# Altium PCB MicrophoneArray.Sensors.Electronics.PcbDoc
Units mm, origin at the board's own origin, x right, y up, seen from the top; angles counter-clockwise.
Board outline 53.34 x 53.34 mm, 2 copper layers (Top Layer, Bottom Layer), stack 1.036 mm thick; 20 components, 13 nets, 164 pads, 49 vias.
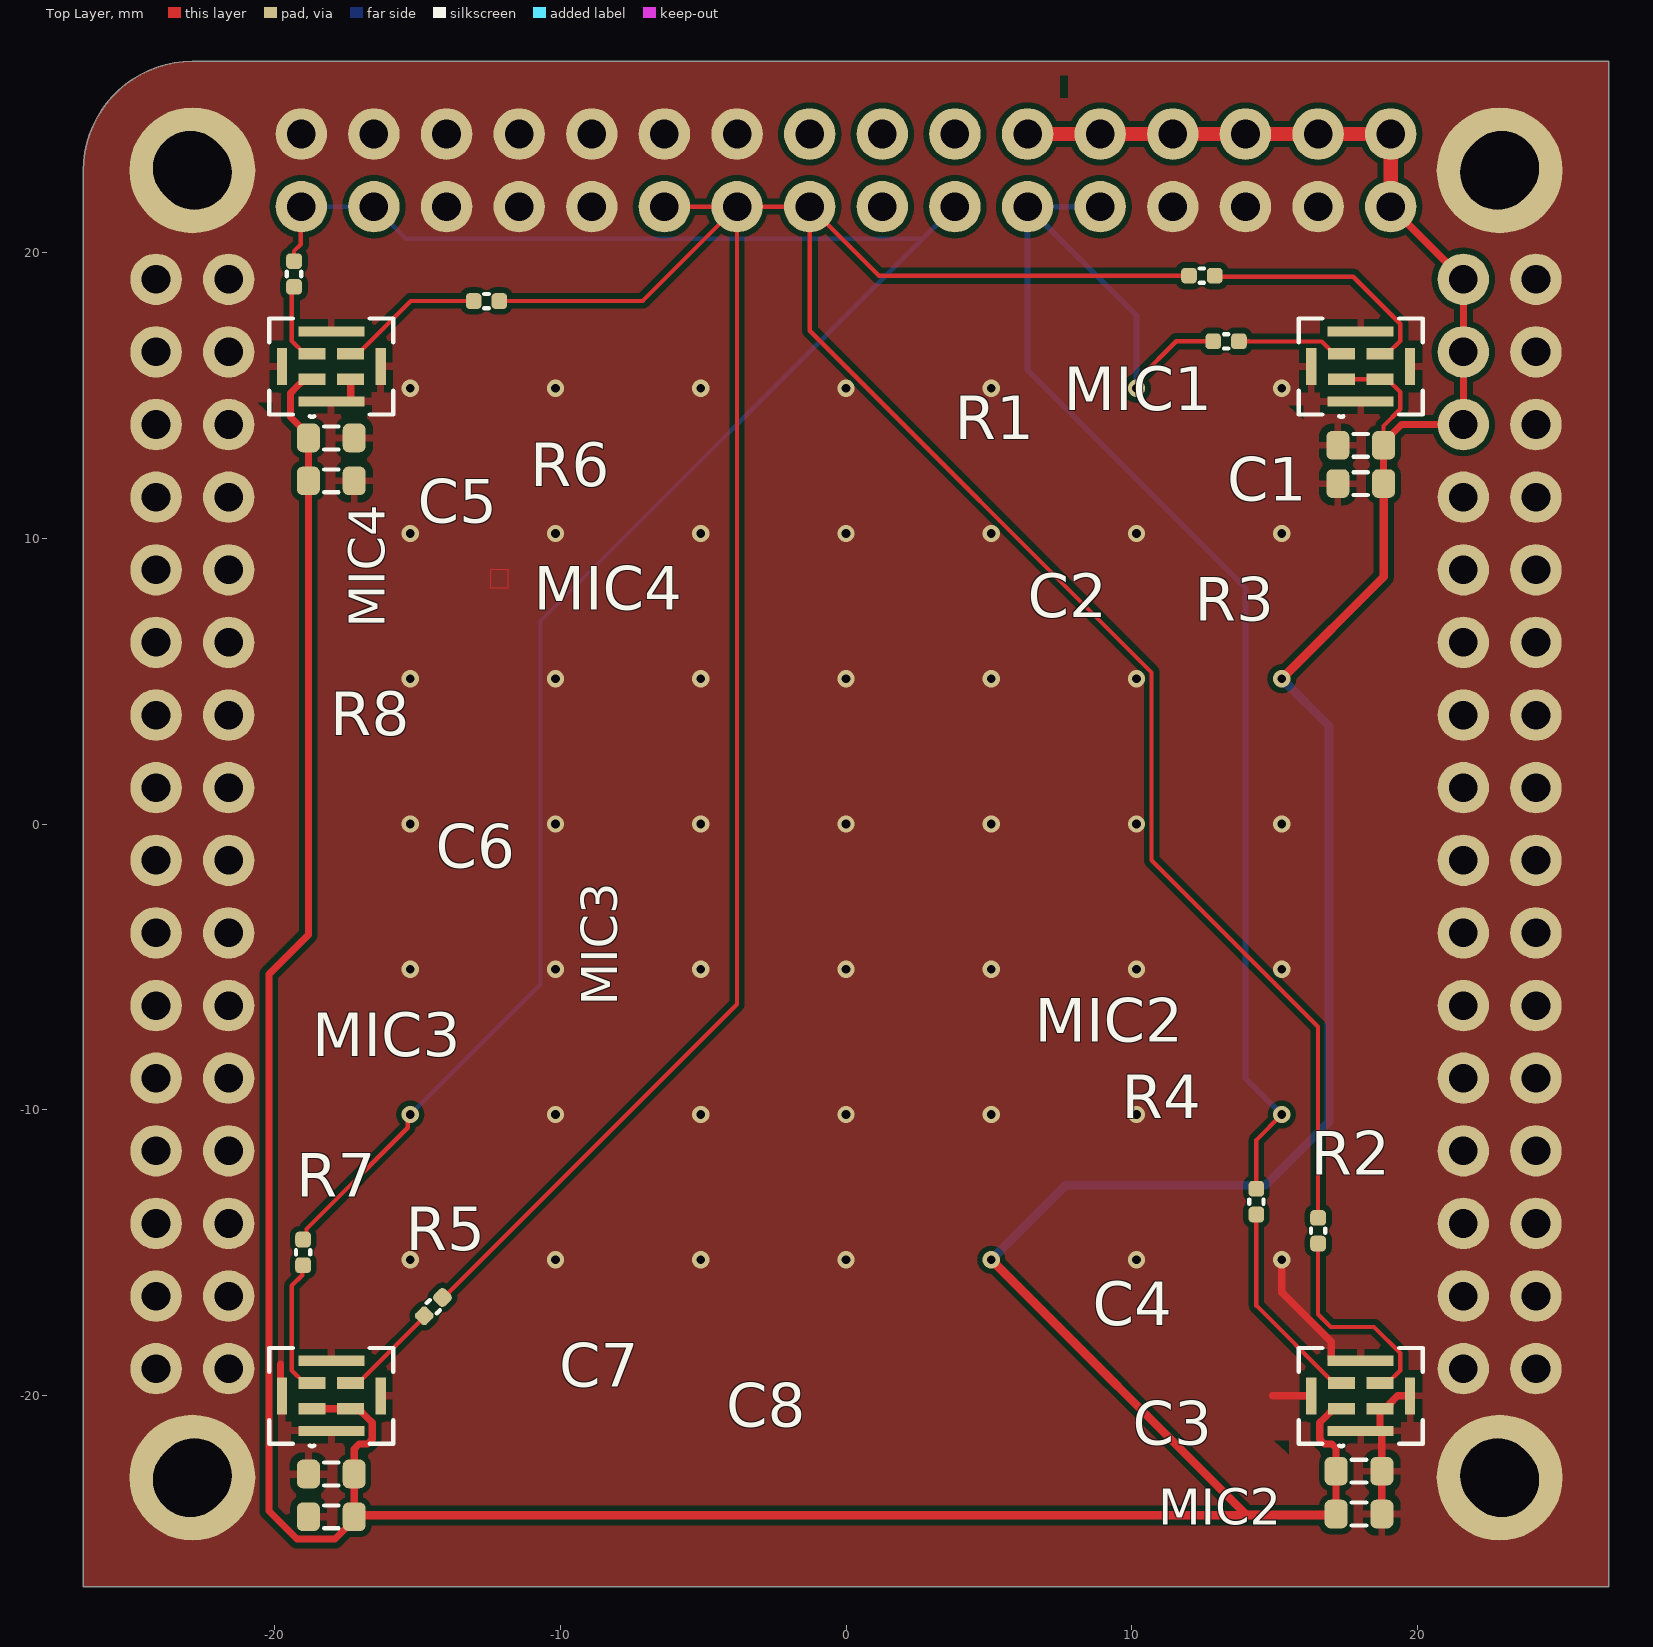
[diagram p0: Top Layer view]
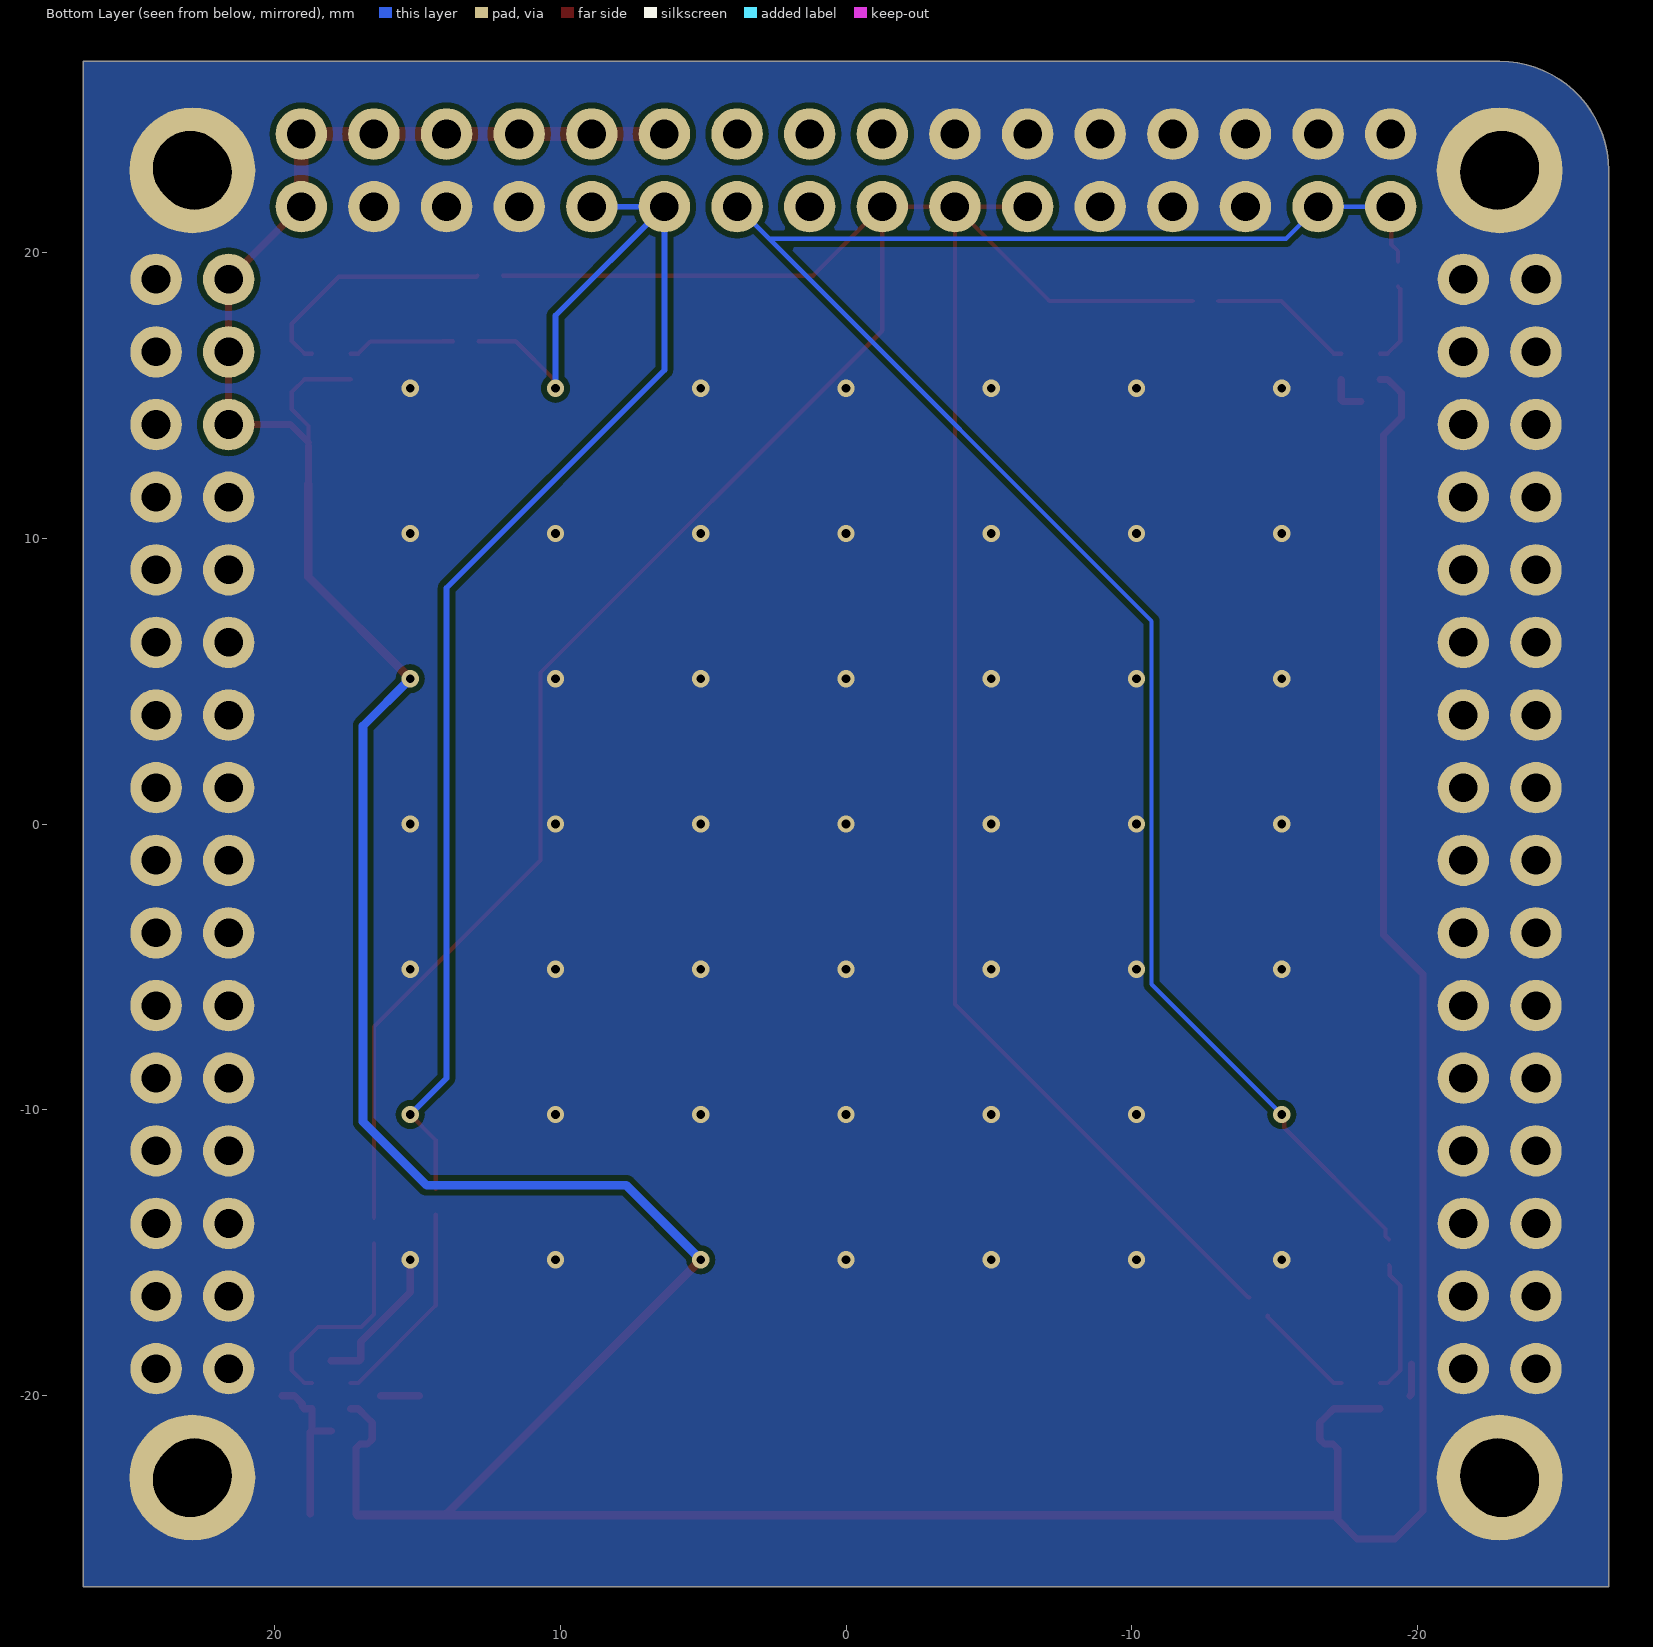
[diagram p1: Bottom Layer view, seen from below]
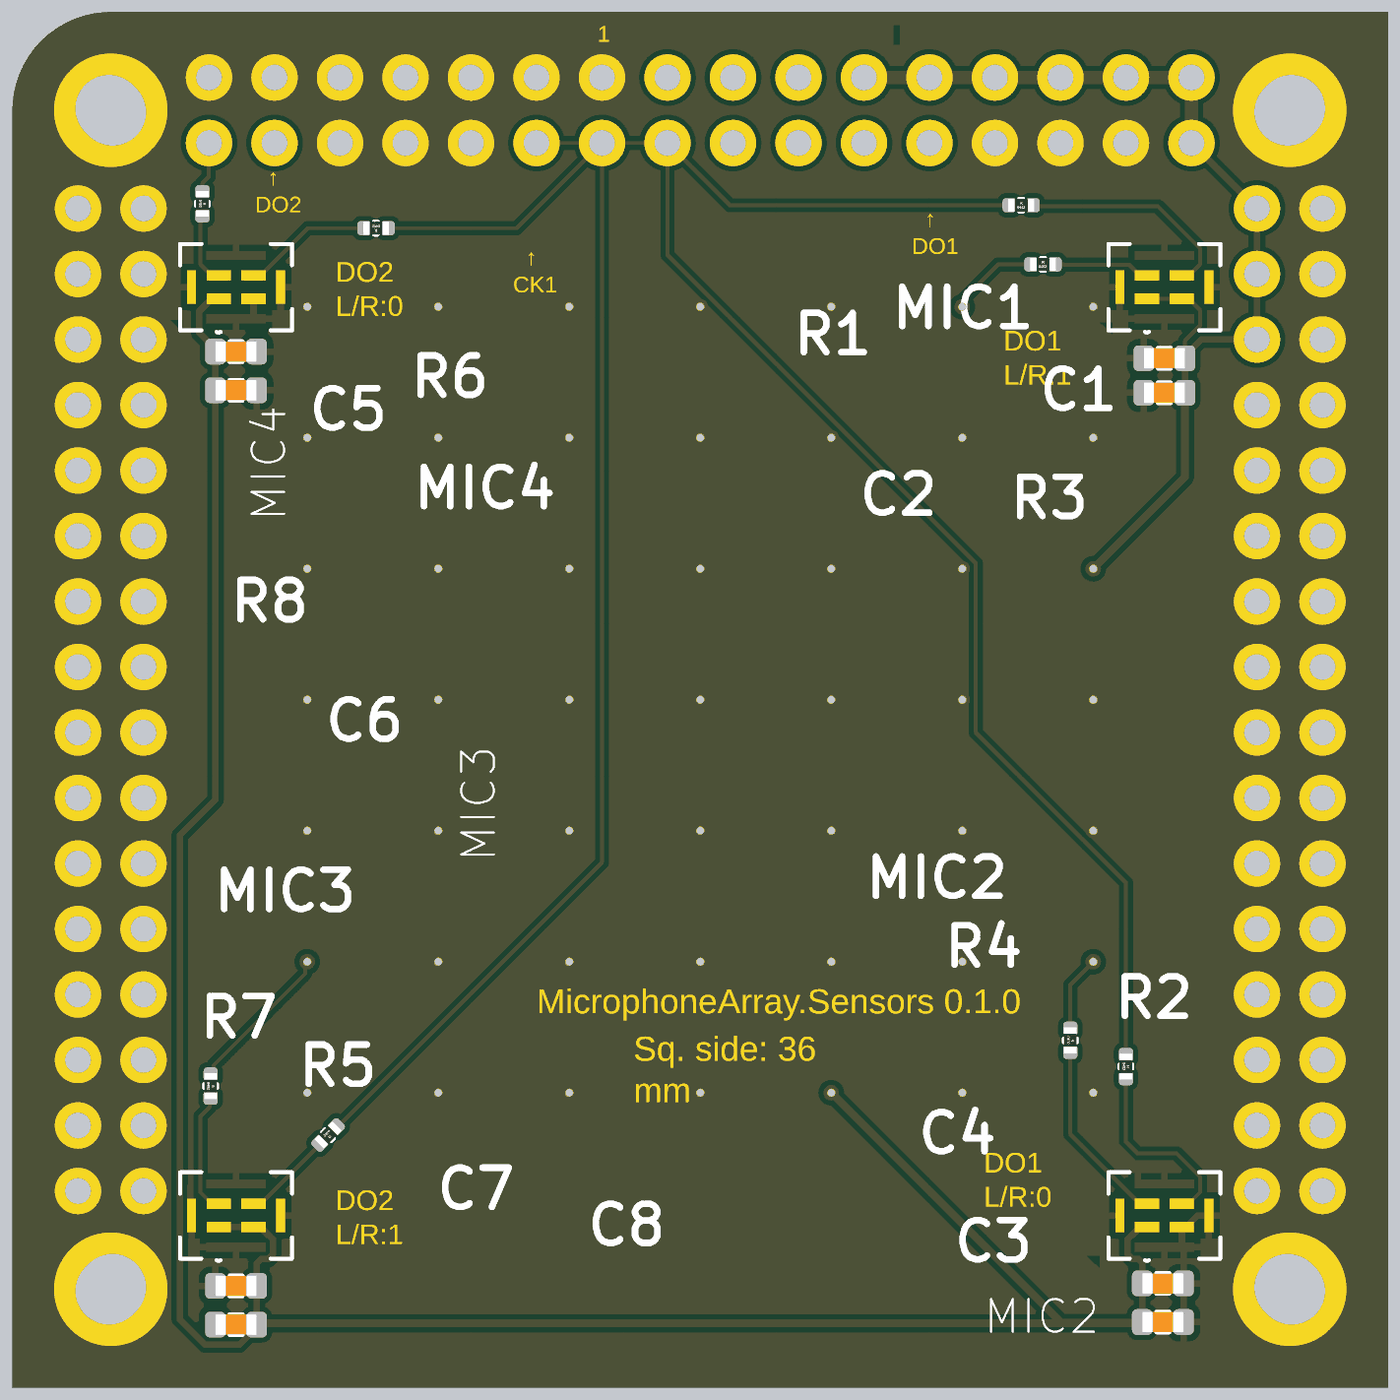
[diagram p2: 3D render of the assembled board from above, using the file's embedded part models]

## Layer stack, top to bottom
Top Solder: solder mask 0.025, SM-004, Dk 4
Top Layer: signal copper 0.018
Dielectric 1: dielectric 1, FR-4, Dk 4.8
Bottom Layer: signal copper 0.018
Bottom Solder: solder mask 0.025, SM-004, Dk 4

## Board outline
-26.67,-26.67 -26.67,22.86 cw(c-22.86,22.86) -22.86,26.67 26.67,26.67 26.67,-26.67

## Design rules (kind name [scope] priority, off if disabled: settings)
BoardOutlineClearance [OnCopper] p1: gap=0.2 ignorepadtopadclearanceinfootprint=FALSE except(0: Poly-OutlineEdge)
Clearance StitchingShieldingViaClearance [IsStitchingVia or IsShieldingVia vs IsVia or IsStitchingVia or IsShieldingVia or IsPad] p1: gap=0.2 ignorepadtopadclearanceinfootprint=FALSE
Clearance BigHoleClearance [IsPad && HoleDiameter > 5] p2: gap=0.45 ignorepadtopadclearanceinfootprint=FALSE
Clearance KeepOutClearance [Keepout] p3: gap=0.2 ignorepadtopadclearanceinfootprint=FALSE
Clearance PolygonClearanceAllLayers [All vs InPolygon] p4: gap=0.2 ignorepadtopadclearanceinfootprint=FALSE
Clearance ClearanceInternalLayers [All vs OnMid] p5: gap=0.1 ignorepadtopadclearanceinfootprint=FALSE
Clearance ClearanceTopBottomLayers [All] p6: gap=0.15 ignorepadtopadclearanceinfootprint=FALSE
ComponentClearance [All] p1: gap=0.15 collisioncheckmode=3 verticalgap=0.15 showdistances=FALSE
DiffPairsRouting [All] p1: maxlimit=0.15 minlimit=0.1 mostfreqgap=0.15 toplayer_minwidth=0.15 toplayer_maxwidth=0.5 toplayer_prefwidth=0.3 bottomlayer_minwidth=0.15 bottomlayer_maxwidth=0.5 bottomlayer_prefwidth=0.3 maxuncoupledlength=12.7
HoleSize [All] p1: absolutevalues=TRUE maxlimit=10 minlimit=0.2 maxpercent=80.000 minpercent=20.000
HoleToHoleClearance [All] p1: gap=0.2 allowstackedmicrovias=TRUE
MatchedLengths HDMI_MatchedLengths [InxSignalClass('HDMI_xSignals')] p1: tolerance=25.4 checknetsindiffpair=TRUE checkdiffpairvsdiffpair=FALSE checkxsignals=FALSE checkothers=FALSE usedelayunits=TRUE delaytolerance=1.000000
MatchedLengths DIffPairMatchedLengths [InDifferentialPairClass('LVDS_DiffPair')] p2: tolerance=25.4 checknetsindiffpair=FALSE checkdiffpairvsdiffpair=TRUE checkxsignals=TRUE checkothers=TRUE usedelayunits=TRUE delaytolerance=300.000000
MatchedLengths [InDifferentialPairClass('All Differential Pairs')] p3: tolerance=0.3 checknetsindiffpair=TRUE checkdiffpairvsdiffpair=FALSE checkxsignals=FALSE checkothers=FALSE usedelayunits=TRUE delaytolerance=1.000000
MinimumAnnularRing [All] p1: minimumring=0.1
MinimumSolderMaskSliver [All] p1: minsoldermaskwidth=0.05
PlaneConnect [All] p1: pad.planeconnectstyle=Relief pad.reliefexpansion=0.508 pad.reliefentries=4 pad.reliefconductorwidth=0.254 pad.reliefairgap=0.254 via.planeconnectstyle=Direct via.reliefexpansion=0.508 via.reliefentries=4 via.reliefconductorwidth=0.254 via.reliefairgap=0.254
PolygonConnect PowerPolygonConnect [Not InNet('GND')] p1: connectstyle=Direct reliefconductorwidth=0.254 reliefentries=4 polygonreliefangle="90 Angle" airgapwidth=0.254
PolygonConnect GND_PolygonConnect [InNet('GND')] p2: thpad.connectstyle=Relief thpad.reliefconductorwidth=0.3 thpad.reliefentries=4 thpad.polygonreliefangle="90 Angle" thpad.airgapwidth=0.25 smdpad.connectstyle=Relief smdpad.reliefconductorwidth=0.25 smdpad.reliefentries=4 smdpad.polygonreliefangle="90 Angle" smdpad.airgapwidth=0.25 via.connectstyle=Direct via.reliefconductorwidth=0.254 via.reliefentries=4 via.polygonreliefangle="90 Angle" via.airgapwidth=0.254
RoutingVias [All] p1: holewidth=0.2 width=0.5 viastyle="Through Hole" minholewidth=0.2 minwidth=0.4 maxholewidth=1 maxwidth=2
SilkToSilkClearance [All] p1: silktosilkclearance=0.01
SilkToSolderMaskClearance [IsPad] p1: minsilkscreentomaskgap=0.01 clearancetoexposedcopper=TRUE
SolderMaskExpansion ViaSolderMaskExpansion [IsVia] p1: expansion=0.102 istentingtop=TRUE
SolderMaskExpansion [All] p2: expansion=0 istentingtop=FALSE
ViasUnderSMD [All] p1: allowed=TRUE
Width WidthInternalLayers [OnMid] p1: maxlimit=8 minlimit=0.1 preferedwidth=0.25
Width WidthTopBottomLayers [OnTopLayer Or OnBottomLayer] p2: maxlimit=8 minlimit=0.15 preferedwidth=0.25
22 further rules are at their usual default settings.

## Components (designator, comment, footprint, x,y, rotation, side; value= is the part's Value field where it differs from the comment)
C1 "100nF" CAP_0603 18,11.905 r0 top
C2 "10uF" CAP_0603 18,13.243 r0 top
C3 "100nF" CAP_0603 17.941,-24.132 r180 top
C4 "10uF" CAP_0603 17.941,-22.632 r180 top
C5 "100nF" CAP_0603 -18,12 r180 top
C6 "10uF" CAP_0603 -18,13.5 r180 top
C7 "100nF" CAP_0603 -18,-22.731 r0 top
C8 "10uF" CAP_0603 -18,-24.231 r0 top
MIC1 "MP34DT01TR-M" HCLGA_3X4X1_STM 18,16 r90 top
MIC2 "MP34DT01TR-M" HCLGA_3X4X1_STM 18,-20 r90 top
MIC3 "MP34DT01TR-M" HCLGA_3X4X1_STM -18,-20 r90 top
MIC4 "MP34DT01TR-M" HCLGA_3X4X1_STM -18,16 r90 top
R1 "0R" RES_0402 12.446,19.177 r0 top
R2 "0R" RES_0402 16.51,-14.224 r270 top
R3 "0R" RES_0402 13.291,16.881 r0 top
R4 "0R" RES_0402 14.351,-13.208 r270 top
R5 "0R" RES_0402 -14.432,-16.879 r225 top
R6 "0R" RES_0402 -12.573,18.288 r180 top
R7 "0R" RES_0402 -18.987,-14.983 r270 top
R8 "0R" RES_0402 -19.304,19.235 r270 top

## Footprints (in the part's own frame and the unit in brackets; to place one, negate y for a bottom-side part, rotate by r counter-clockwise, add the part's x,y. Pads: shape width x height; smd on the part's side, far side on the other; paste and mask are expansions set on the pad)
CAP_0603 [mm]
  rrect50% 0.8x1 smd: 1(-0.8,0) 2(0.8,0)
  silkscreen extent -0.25,-0.4 0.25,0.4, body extent -0.8,-0.4 0.8,0.4, height 0.8
HCLGA_3X4X1_STM [mil]
  rect 16x37 smd paste-8 mask+0: 1(-17.75,26.62) 2(-17.75,-26.62) 3(17.75,-26.62) 4(17.75,26.62)
  rect 51x14 smd paste-7 mask+0: 5(0,68) 6(0,-68)
  rect 14x91 smd paste-45.5 mask-45.5: 7(-48.25,0) 8(48.25,0)
  Top Layer region: 0,-7 0,-7 0,-7 0,-7 0,-7 0,-7 0,-7 0,-7
  Top Layer region: 0,7 0,7 0,7 0,7 0,7 0,7 0,7 0,7
  silkscreen extent -69,-86 66,86
RES_0402 [mm] "0.062W"
  rrect50% 0.55x0.55 smd: 1(-0.45,0) 2(0.45,0)
  silkscreen extent -0.08,-0.25 0.08,0.25, body extent -0.5,-0.25 0.5,0.25, height 0.35

## Part data
C1 C2 C3 C4 C5 C6 C7 C8: library part Capacitor_Non-polar
MIC1 MIC2 MIC3 MIC4: "Digital MEMS microphone, low power, ultra-compact, top-port, omnidirectional, 120 dBSPL AOP, 61 dB SNR, -26 dBFS sensitivity", Manufacturer_Name=STMicroelectronics, Copyright="Copyright (C) 2026 Ultra Librarian. All rights reserved.", Datasheet=https://www.st.com/resource/en/datasheet/mp34dt01-m.pdf, Digi-Key_Part_Number_1=497-15102-2-ND, Digi-Key_Part_Number_2=497-15102-1-ND, Digi-Key_Part_Number_3=497-15102-6-ND, Manufacturer_Part_Number=MP34DT01TR-M, RefDes=RefDes, Type=Type
R1 R2 R3 R4 R5 R6 R7 R8: library part Resistor

## Free pads (board coordinates)
  round 1.8 hole 1: 1(-24.13,-19.05) 1(-24.13,-16.51) 1(-24.13,-13.97) 1(-24.13,-11.43) 1(-24.13,-8.89) 1(-24.13,-6.35) 1(-24.13,-3.81) 1(-24.13,-1.27) 1(-24.13,1.27) 1(-24.13,3.81) 1(-24.13,6.35) 1(-24.13,8.89) 1(-24.13,11.43) 1(-24.13,13.97) 1(-24.13,16.51) 1(-24.13,19.05) 1(-21.59,-19.05) 1(-21.59,-16.51) 1(-21.59,-13.97) 1(-21.59,-11.43) 1(-21.59,-8.89) 1(-21.59,-6.35) 1(-21.59,-3.81) 1(-21.59,-1.27) 1(-21.59,1.27) 1(-21.59,3.81) 1(-21.59,6.35) 1(-21.59,8.89) 1(-21.59,11.43) 1(-21.59,13.97) 1(-21.59,16.51) 1(-21.59,19.05) 1(-19.05,21.59) 1(-19.05,24.13) 1(-16.51,24.13) 1(-16.51,21.59) 1(-13.97,21.59) 1(-13.97,24.13) 1(-11.43,24.13) 1(-11.43,21.59) 1(-8.89,21.59) 1(-8.89,24.13) 1(-6.35,24.13) 1(-6.35,21.59) 1(-3.81,21.59) 1(-3.81,24.13) 1(-1.27,21.59) 1(-1.27,24.13) 1(1.27,21.59) 1(1.27,24.13) 1(3.81,24.13) 1(3.81,21.59) 1(6.35,21.59) 1(6.35,24.13) 1(8.89,21.59) 1(8.89,24.13) 1(11.43,21.59) 1(11.43,24.13) 1(13.97,24.13) 1(13.97,21.59) 1(16.51,21.59) 1(16.51,24.13) 1(19.05,21.59) 1(19.05,24.13) 1(21.59,-13.97) 1(21.59,19.05) 1(21.59,-16.51) 1(21.59,-8.89) 1(21.59,-6.35) 1(21.59,-3.81) 1(21.59,-1.27) 1(21.59,1.27) 1(21.59,3.81) 1(21.59,6.35) 1(21.59,8.89) 1(21.59,13.97) 1(21.59,16.51) 1(21.59,-19.05) 1(21.59,11.43) 1(21.59,-11.43) 1(24.13,13.97) 1(24.13,-19.05) 1(24.13,-16.51) 1(24.13,-13.97) 1(24.13,-11.43) 1(24.13,-8.89) 1(24.13,-6.35) 1(24.13,-3.81) 1(24.13,-1.27) 1(24.13,1.27) 1(24.13,3.81) 1(24.13,6.35) 1(24.13,8.89) 1(24.13,11.43) 1(24.13,16.51) 1(24.13,19.05)
  round 4.4 hole 2.6 slot 2.8 at 135 deg: 1(-22.86,22.86) 3(22.86,-22.86)
  round 4.4 hole 2.6 slot 2.8 at 45 deg: 2(22.86,22.86) 4(-22.86,-22.86)

## Via types
v1: diameter 0.6, hole 0.3, Top Layer to Bottom Layer, tented both sides, 49 vias

## Nets (pads, with @x,y where several pads share a name; then routed paths per layer and width w, separated by ;. In a path a pad name is that pad's centre, name@x,y a point inside that pad or via, vN(x,y) a via of type N, cw(c..) or ccw(c..) an arc to the next point about the centre after c; other vN are vias at no path point)
CK1: pad.1@-1.27,21.59 pad.1@-3.81,21.59 pad.1@-6.35,21.59 R1.1 R2.1 R5.1 R6.1 | length 114.2
  Top Layer w0.15: R5.1 -14.069,-16.561 -3.81,-6.302 pad.1@-3.81,21.59 ; R6.1 -7.112,18.288 pad.1@-3.81,21.59 ; pad.1@-6.35,21.59 pad.1@-3.81,21.59 ; R1.1 1.143,19.177 pad.1@-1.27,21.59 ; R2.1 16.51,-7.092 10.685,-1.267 10.685,5.297 -1.27,17.252 pad.1@-1.27,21.59 ; pad.1@-3.81,21.59 pad.1@-1.27,21.59
DO1: pad.1@6.35,21.59 pad.1@8.89,21.59 R3.1 R4.1 | length 52.4
  Top Layer w0.15: v1(10.16,15.24) 10.246,15.326 10.246,15.58 11.547,16.881 R3.1 ; R4.1 14.351,-11.049 v1(15.24,-10.16)
  Bottom Layer w0.2: pad.1@8.89,21.59 pad.1@6.35,21.59 ; v1(10.16,15.24) 10.16,17.78 pad.1@6.35,21.59 ; v1(15.24,-10.16) 13.97,-8.89 13.97,8.255 6.35,15.875 pad.1@6.35,21.59
DO2: pad.1@3.81,21.59 pad.1@-16.51,21.59 pad.1@-19.05,21.59 R7.1 R8.1 | length 69.8
  Top Layer w0.15: R8.1 -19.304,20.035 -19.064,20.275 -19.064,21.575 pad.1@-19.05,21.59 ; R7.1 -18.868,-14.414 -18.868,-14.164 -15.326,-10.623 -15.326,-10.246 v1(-15.24,-10.16)
  Bottom Layer w0.15: pad.1@-19.05,21.59 -16.51,21.59 -15.385,20.465 -15.24,20.465 2.685,20.465 ; v1(-15.24,-10.16) -10.685,-5.605 -10.685,7.095 2.685,20.465 ; pad.1@3.81,21.59 2.685,20.465
GND: C1.1 C2.1 C3.1 C4.1 C5.1 C6.1 C7.1 C8.1 MIC1.5 MIC1.6 MIC1.7 MIC1.8 MIC2.2 MIC2.5 MIC2.6 MIC2.7 MIC2.8 MIC3.5 MIC3.6 MIC3.7 MIC3.8 MIC4.2 MIC4.5 MIC4.6 MIC4.7 MIC4.8 pad.1@11.43,21.59 pad.1@13.97,21.59 pad.1@16.51,21.59 pad.1@21.59,1.27 pad.1@21.59,3.81 pad.1@21.59,6.35 pad.1@21.59,8.89 pad.1@21.59,11.43 pad.1@21.59,-1.27 pad.1@21.59,-3.81 pad.1@21.59,-6.35 pad.1@21.59,-8.89 pad.1@21.59,-11.43 pad.1@21.59,-13.97 pad.1@21.59,-16.51 pad.1@21.59,-19.05 pad.1@24.13,1.27 pad.1@24.13,3.81 pad.1@24.13,6.35 pad.1@24.13,8.89 pad.1@24.13,11.43 pad.1@24.13,13.97 pad.1@24.13,16.51 pad.1@24.13,19.05 pad.1@24.13,-1.27 pad.1@24.13,-3.81 pad.1@24.13,-6.35 pad.1@24.13,-8.89 pad.1@24.13,-11.43 pad.1@24.13,-13.97 pad.1@24.13,-16.51 pad.1@24.13,-19.05 pad.1@-3.81,24.13 pad.1@-6.35,24.13 pad.1@-8.89,21.59 pad.1@-8.89,24.13 pad.1@-11.43,21.59 pad.1@-11.43,24.13 pad.1@-13.97,21.59 pad.1@-13.97,24.13 pad.1@-16.51,24.13 pad.1@-19.05,24.13 pad.1@-21.59,1.27 pad.1@-21.59,3.81 pad.1@-21.59,6.35 pad.1@-21.59,8.89 pad.1@-21.59,11.43 pad.1@-21.59,13.97 pad.1@-21.59,16.51 pad.1@-21.59,19.05 pad.1@-21.59,-1.27 pad.1@-21.59,-3.81 pad.1@-21.59,-6.35 pad.1@-21.59,-8.89 pad.1@-21.59,-11.43 pad.1@-21.59,-13.97 pad.1@-21.59,-16.51 pad.1@-21.59,-19.05 pad.1@-22.86,22.86 pad.1@-24.13,1.27 pad.1@-24.13,3.81 pad.1@-24.13,6.35 pad.1@-24.13,8.89 pad.1@-24.13,11.43 pad.1@-24.13,13.97 pad.1@-24.13,16.51 pad.1@-24.13,19.05 pad.1@-24.13,-1.27 pad.1@-24.13,-3.81 pad.1@-24.13,-6.35 pad.1@-24.13,-8.89 pad.1@-24.13,-11.43 pad.1@-24.13,-13.97 pad.1@-24.13,-16.51 pad.1@-24.13,-19.05 pad.2 pad.3 pad.4 | length 14.9
  Top Layer w0.254: -19.777,-18.882 -19.777,-19.95 MIC3.5 ; MIC4.7 -17.375,14.774 -17.324,14.825 MIC4.2 ; 14.92,-20 MIC2.5 ; v1(15.24,-15.24) 15.24,-16.377 16.971,-18.108 16.971,-18.724 17.022,-18.774 MIC2.8 ; MIC2.7 MIC2.7@18.625,-21.226 ; C3.1 C4.1 18.741,-21.276 18.69,-21.226 MIC2.7@18.625,-21.226 ; MIC2.6 19.29,-20 19.019,-20.271 19.019,-20.375 18.943,-20.451 MIC2.2 18.676,-21.175 MIC2.7@18.625,-21.226
  other v1: -15.24,-15.24 -10.16,-15.24 -5.08,-15.24 0,-15.24 10.16,-15.24 -10.16,-10.16 -5.08,-10.16 0,-10.16 5.08,-10.16 10.16,-10.16 -15.24,-5.08 -10.16,-5.08 -5.08,-5.08 0,-5.08 5.08,-5.08 10.16,-5.08 15.24,-5.08 -15.24,0 -10.16,0 -5.08,0 0,0 5.08,0 10.16,0 15.24,0 -15.24,5.08 -10.16,5.08 -5.08,5.08 0,5.08 5.08,5.08 10.16,5.08 -15.24,10.16 -10.16,10.16 -5.08,10.16 0,10.16 5.08,10.16 10.16,10.16 15.24,10.16 -15.24,15.24 -10.16,15.24 -5.08,15.24 0,15.24 5.08,15.24 15.24,15.24
NetMIC1_3: MIC1.3 R1.2 | length 8.7
  Top Layer w0.15: R1.2 12.936,19.137 17.74,19.137 19.381,17.497 19.381,16.889 18.943,16.451 MIC1.3
NetMIC1_4: MIC1.4 R3.2 | length 3.8
  Top Layer w0.15: R3.2 14.091,16.881 14.1,16.873 16.635,16.873 17.057,16.451 MIC1.4
NetMIC2_3: MIC2.3 R2.2 | length 7.4
  Top Layer w0.15: R2.2 16.508,-14.676 16.508,-17.147 16.951,-17.59 18.467,-17.59 19.381,-18.503 19.381,-19.111 18.943,-19.549 MIC2.3
NetMIC2_4: MIC2.4 R4.2 | length 7.3
  Top Layer w0.15: R4.2 14.351,-16.843 17.057,-19.549 MIC2.4
NetMIC3_3: MIC3.3 R5.2 | length 3.6
  Top Layer w0.15: MIC3.3 -17.057,-19.549 -14.75,-17.242 R5.2
NetMIC3_4: MIC3.4 R7.2 | length 4.7
  Top Layer w0.15: R7.2 -19.019,-15.466 -19.019,-15.783 -19.381,-16.145 -19.381,-19.111 -18.943,-19.549 MIC3.4
NetMIC4_3: MIC4.3 R6.2 | length 5.1
  Top Layer w0.15: MIC4.3 -17.057,16.451 -15.22,18.288 R6.2
NetMIC4_4: MIC4.4 R8.2 | length 2.8
  Top Layer w0.15: R8.2 -19.381,18.708 -19.381,16.889 -18.943,16.451 MIC4.4
VDD_MICS: C1.2 C2.2 C3.2 C4.2 C5.2 C6.2 C7.2 C8.2 MIC1.1 MIC1.2 MIC2.1 MIC3.1 MIC3.2 MIC4.1 pad.1@6.35,24.13 pad.1@8.89,24.13 pad.1@11.43,24.13 pad.1@13.97,24.13 pad.1@16.51,24.13 pad.1@19.05,21.59 pad.1@19.05,24.13 pad.1@21.59,13.97 pad.1@21.59,16.51 pad.1@21.59,19.05 | length 176.4
  Top Layer w0.15: MIC1.1 MIC1.2 18.943,15.549 19.381,15.111 19.381,14.503 18.8,13.923 18.8,13.343 C2.2
  Top Layer w0.25: MIC3.1 MIC3.2 -17.057,-20.451 -16.735,-20.773 -16.73,-20.773 -16.569,-20.934 -16.569,-21.517 -16.739,-21.687 -17.031,-21.687 -17.2,-21.856 C7.2 C8.2 -17.15,-24.181 -17.15,-24.281 -17.875,-25.006 -19.197,-25.006 -20.18,-24.023 -20.18,-5.255 -18.8,-3.875 C5.2 C6.2 -18.8,13.6 -19.431,14.231 -19.431,15.066 -19.254,15.243 -19.249,15.243 -18.943,15.549 MIC4.1 ; 13.972,-24.132 C3.2 ; C3.2@17.092,-24.181 C3.2 ; MIC2.1 17.057,-20.451 16.735,-20.773 16.73,-20.773 16.569,-20.934 16.569,-21.517 16.73,-21.678 16.995,-21.678 17.141,-21.825 C4.2 C3.2 ; C1.2 C2.2 ; C2.2@18.8,13.343 19.427,13.97 21.59,13.97 21.59,16.51 21.59,19.05 pad.1@19.05,21.59
  Top Layer w0.3: C8.2@-17.15,-24.181 C3.2@17.092,-24.181 ; v1(5.08,-15.24) 13.972,-24.132 ; v1(15.24,5.08) 18.8,8.64 C1.2
  Top Layer w0.5: pad.1@6.35,24.13 8.89,24.13 11.43,24.13 13.97,24.13 16.51,24.13 19.05,24.13 pad.1@19.05,21.59
  Bottom Layer w0.3: v1(5.08,-15.24) 7.684,-12.636 14.669,-12.636 16.891,-10.414 16.891,3.429 v1(15.24,5.08)

## Polygon pours and split planes (outlines as drawn)
no net on PCB_Contour (solid): -26.67,-26.67 -26.67,22.86 cw(c-22.86,22.86) -22.86,26.67 26.67,26.67 26.67,-26.67
GND on Top Layer "Top_pour" (solid, pour order 2): -26.67,-26.67 -26.67,22.86 cw(c-22.86,22.86) -22.86,26.67 26.67,26.67 26.67,-26.67
no net on Top Layer "NONET_L-01_P-001" (solid, pour order 4): -11.811,8.89 -12.446,8.89 -12.446,8.255 -11.811,8.255
GND on Bottom Layer "Bottom_pour" (solid, pour order 3): -26.67,-26.67 -26.67,22.86 cw(c-22.86,22.86) -22.86,26.67 26.67,26.67 26.67,-26.67

## Other copper
Top Layer:
  pour cut-out: 7.493,26.162 7.493,25.4 7.747,25.4 7.747,26.162
  pour cut-out: 14.979,-21.563 15.487,-21.563 15.487,-22.046 15.489,-22.047
  pour cut-out: 15.487,14.632 15.995,14.632 15.995,14.149 15.997,14.148
  pour cut-out: -20.574,14.732 -20.066,14.732 -20.066,14.249 -20.065,14.248

## Silkscreen, mask and mechanical layers (free items; w line width, h text height)
Top Solder:
  text "1" at -3.937,25.46 h1
  text "↑ / DO2" at -17.219,18.883 h1
  text "↑ / DO1" at 8.255,17.272 h1
  text "↑ / CK1" at -7.212,15.778 h1
  text "DO2 / L/R:0" at -14.097,15.113 h1.25
  text "DO1 / L/R:1" at 11.811,12.446 h1.25
  text "MicrophoneArray.Sensors 0.1.0" at -6.35,-12.16 h1.52
  text "Sq. side: 36 mm" at -2.54,-14.348 h1.52
  text "DO1 / L/R:0" at 11.049,-19.431 h1.25
  text "DO2 / L/R:1" at -14.097,-20.887 h1.25
PewCB.Tray:
  circle w0.254: c-7.62,7.62 r1.2
  circle w0.254: c7.62,7.62 r1.2
  circle w0.254: c-7.62,-7.62 r1.2
  circle w0.254: c7.62,-7.62 r1.2
  circle w0.254: c7.62,22.86 r1.2
  circle w0.254: c-7.62,22.86 r1.2
  circle w0.254: c7.62,-38.1 r1.2
  circle w0.254: c-7.62,-38.1 r1.2
  circle w0.254: c7.62,-22.86 r1.2
  circle w0.254: c-7.62,-22.86 r1.2
  circle w0.254: c-7.62,38.1 r1.2
  circle w0.254: c7.62,38.1 r1.2
  circle w0.254: c22.86,38.1 r1.2
  circle w0.254: c22.86,-22.86 r1.2
  circle w0.254: c22.86,-38.1 r1.2
  circle w0.254: c22.86,22.86 r1.2
  circle w0.254: c22.86,-7.62 r1.2
  circle w0.254: c22.86,7.62 r1.2
  circle w0.254: c38.1,38.1 r1.2
  circle w0.254: c38.1,-22.86 r1.2
  circle w0.254: c38.1,-38.1 r1.2
  circle w0.254: c38.1,22.86 r1.2
  circle w0.254: c38.1,-7.62 r1.2
  circle w0.254: c38.1,7.62 r1.2
  circle w0.254: c-22.86,38.1 r1.2
  circle w0.254: c-38.1,38.1 r1.2
  circle w0.254: c-38.1,-22.86 r1.2
  circle w0.254: c-22.86,-22.86 r1.2
  circle w0.254: c-38.1,-38.1 r1.2
  circle w0.254: c-22.86,-38.1 r1.2
  circle w0.254: c-38.1,22.86 r1.2
  circle w0.254: c-22.86,22.86 r1.2
  circle w0.254: c-22.86,-7.62 r1.2
  circle w0.254: c-38.1,-7.62 r1.2
  circle w0.254: c-22.86,7.62 r1.2
  circle w0.254: c-38.1,7.62 r1.2